# EAGLE board main (EAGLE 9.5.1)

Size 201.91 x 100 mm. Coordinates in mm from the lower left corner, seen from the top.
Outline: 41.91,0 201.91,0 201.91,100 41.91,100 41.91,0
Copper layers (1*16): Top 0.035mm / dielectric 1.5mm / Bottom 0.035mm
Design rules "default": minimum track width 6mil, minimum drill 0.35mm, track to track 6mil, track to pad 6mil, pad to pad 6mil, via to via 6mil, smd to smd 6mil, copper to edge 40mil, drill to drill 6mil, minimum pad ring 10mil, minimum via ring 8mil, stop-mask expansion 4mil, vias tented up to drill 0mil, thermal gap 10mil

## Footprints (pad centres in the part's own frame; a part is rotated, then mirrored left to right if it is on the bottom)
C050-030X075 = drill 0.813 octagon: 1 -2.54,0; 2 2.54,0
E2-5 = drill 0.813 pad 1.27: + -1.016,0 | drill 0.813 pad 1.27 octagon: - 1.016,0
USB-MINIB = smd 0.5 x 2.308: D+ 0,4.064; D- -0.8,4.064; GND 1.6,4.064; ID 0.8,4.064; VBUS -1.6,4.064 | smd 2 x 2.4: GND1 -4.4,-2; GND2 -4.4,3.5; GND3 4.4,3.5; GND4 4.4,-2 | hole 1: -2.2,1; 2.2,1
0204/7 = drill 0.813 octagon: 1 -3.81,0; 2 3.81,0
BANANA_CONN = drill 3.81 pad 5.461: P$1 0,0
1X02 = drill 1.016 long: 1 -1.27,0; 2 1.27,0
1X03 = drill 1.016 long: 1 -2.54,0; 2 0,0; 3 2.54,0
CHIP-LED0603 = smd 0.8 x 0.8: A 0,-0.75; C 0,0.75
R2512 = smd 1.8 x 3.2: 1 -2.8,0; 2 2.8,0
R0603 = smd 1 x 1.1: 1 -0.85,0; 2 0.85,0
SOIC127P600X175-8N = smd 1.981 x 0.533: 1 -2.464,1.905; 2 -2.464,0.635; 3 -2.464,-0.635; 4 -2.464,-1.905; 5 2.464,-1.905; 6 2.464,-0.635; 7 2.464,0.635; 8 2.464,1.905
J502-ND-142-0701-801/806 = smd 5.08 x 2.286: 1 2.565,0; G@1 2.565,4.42; G@2 2.565,-4.42 | smd 5.08 x 2.286 bottom: G@3 2.565,4.42; G@4 2.565,-4.42

## Placement (x,y rotation side)
C1  100n  [C050-030X075]  25.4,48.26 0 top
C2  100n  [C050-030X075]  16.51,48.26 0 top
C3  10u  [E2-5]  -8.89,46.99 0 top  (outside the outline)
C4  100n  [C050-030X075]  7.62,48.26 0 top
CN1  USB  [USB-MINIB]  22.86,26.67 0 top
FB1  0  [0204/7]  19.05,53.34 0 top
J1  v+  [BANANA_CONN]  25.4,39.37 0 top
J2  v-  [BANANA_CONN]  19.05,39.37 0 top
JP2  PWR  [1X02]  -5.08,38.1 0 top  (outside the outline)
JP3  refSet  [1X03]  2.54,38.1 0 top
LED1  yellow  [CHIP-LED0603]  0,45.72 0 top
R1  10m  [R2512]  11.43,38.1 0 top
R2  470  [R0603]  25.4,54.61 0 top
U1  LT1999CS8-50PBF  [SOIC127P600X175-8N]  -6.35,26.67 0 top  (outside the outline)
X1  SMA-142-0701-801/806  [J502-ND-142-0701-801/806]  0,10.16 0 top

## Library data of the parts
C1-C4 = rcl; SPICEPREFIX: C
CN1 = adafruit
FB1 R2 = rcl; SPICEPREFIX: R
J1 J2 = SparkFun-Connectors
JP2 JP3 = pinhead
LED1 = led
R1 = resistor
U1 = LTC_By_element14_Batch_1; MPN: LT1999CS8-50#PBF; OC_FARNELL: 1868097; OC_NEWARK: 24T0472; PACKAGE: SOIC-8; SUPPLIER: LINEAR TECHNOLOGY
X1 = con-coax; MF: JOHNSON COMPONENTS; MPN: 142-0701-801; OC_FARNELL: 1608592; OC_NEWARK: 90F2624

## Nets
+5V: C2.1 FB1.1 U1.1 U1.4
GND: C1.2 C2.2 C3.- C4.2 CN1.GND JP2.1 LED1.C U1.5 X1.G@1 X1.G@2 X1.G@3 X1.G@4
N$1: LED1.A R2.1
OUT: JP3.3 U1.7
OUTPUT: JP3.2 X1.1
REF: C1.1 JP3.1 U1.6
V+: J1.P$1 R1.1 U1.2
V-: J2.P$1 R1.2 U1.3
VCC: C3.+ C4.1 CN1.VBUS FB1.2 JP2.2 R2.2

## Tracks (layer width: path | path; a pad name or v marks a point on that pad's centre or on a via)
+5V  (3 unrouted)
GND  (11 unrouted)
N$1  (1 unrouted)
OUT  (1 unrouted)
OUTPUT  (1 unrouted)
REF  (2 unrouted)
V+  (2 unrouted)
V-  (2 unrouted)
VCC  (5 unrouted)